# EAGLE board Pow_bank_vero_ckt_V2 (EAGLE 7.7.0)
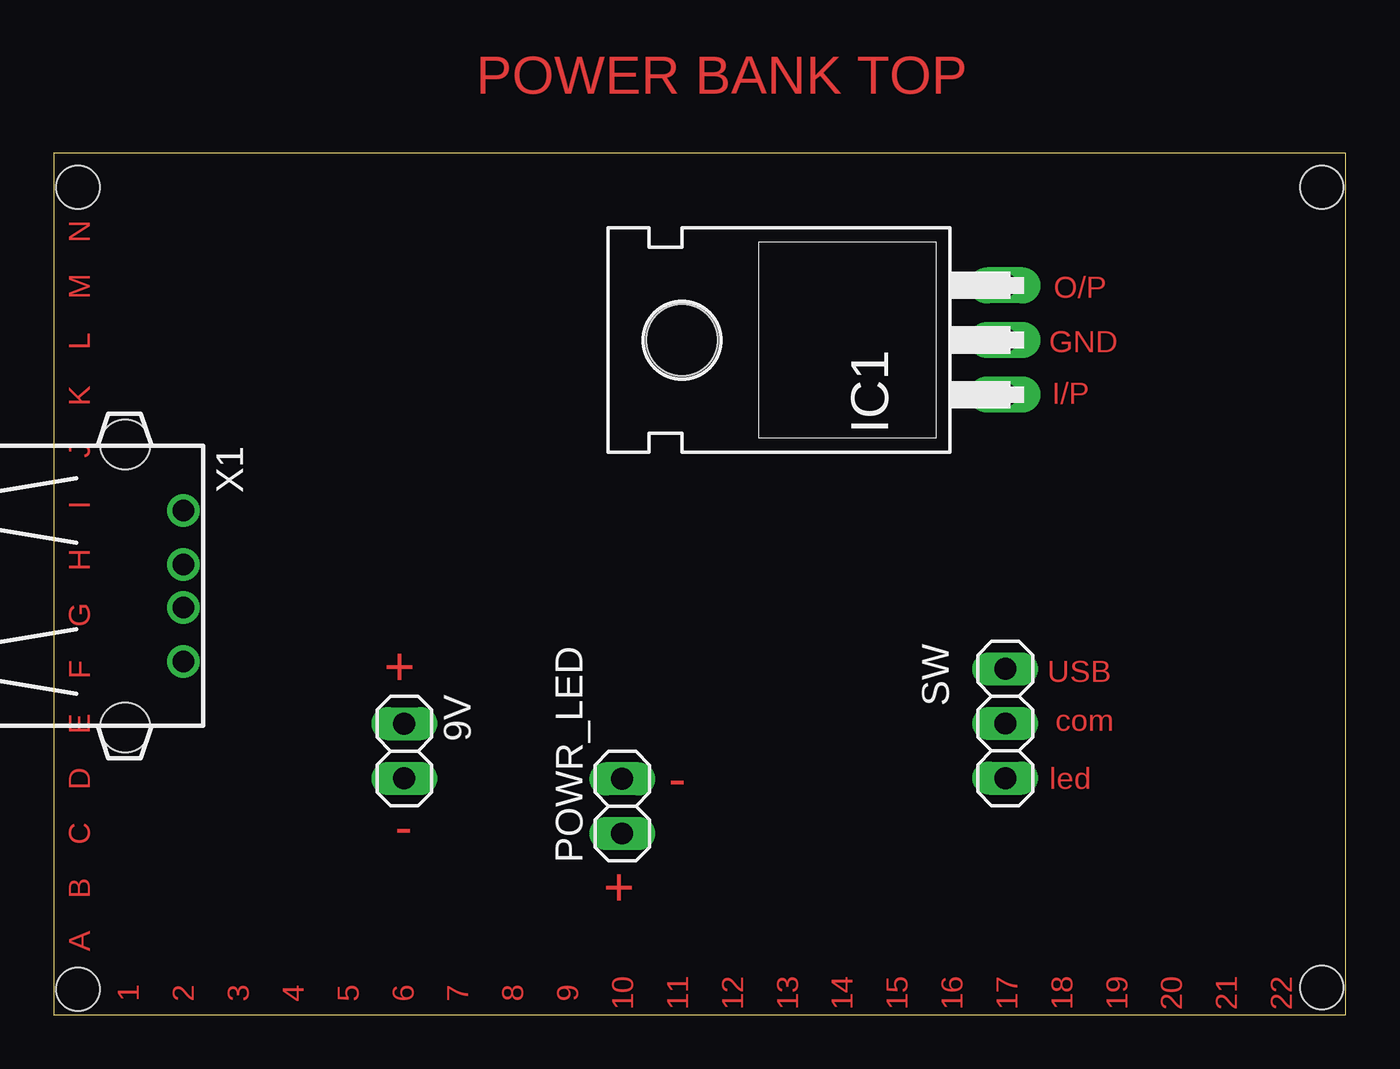
[diagram p0: board, top side]
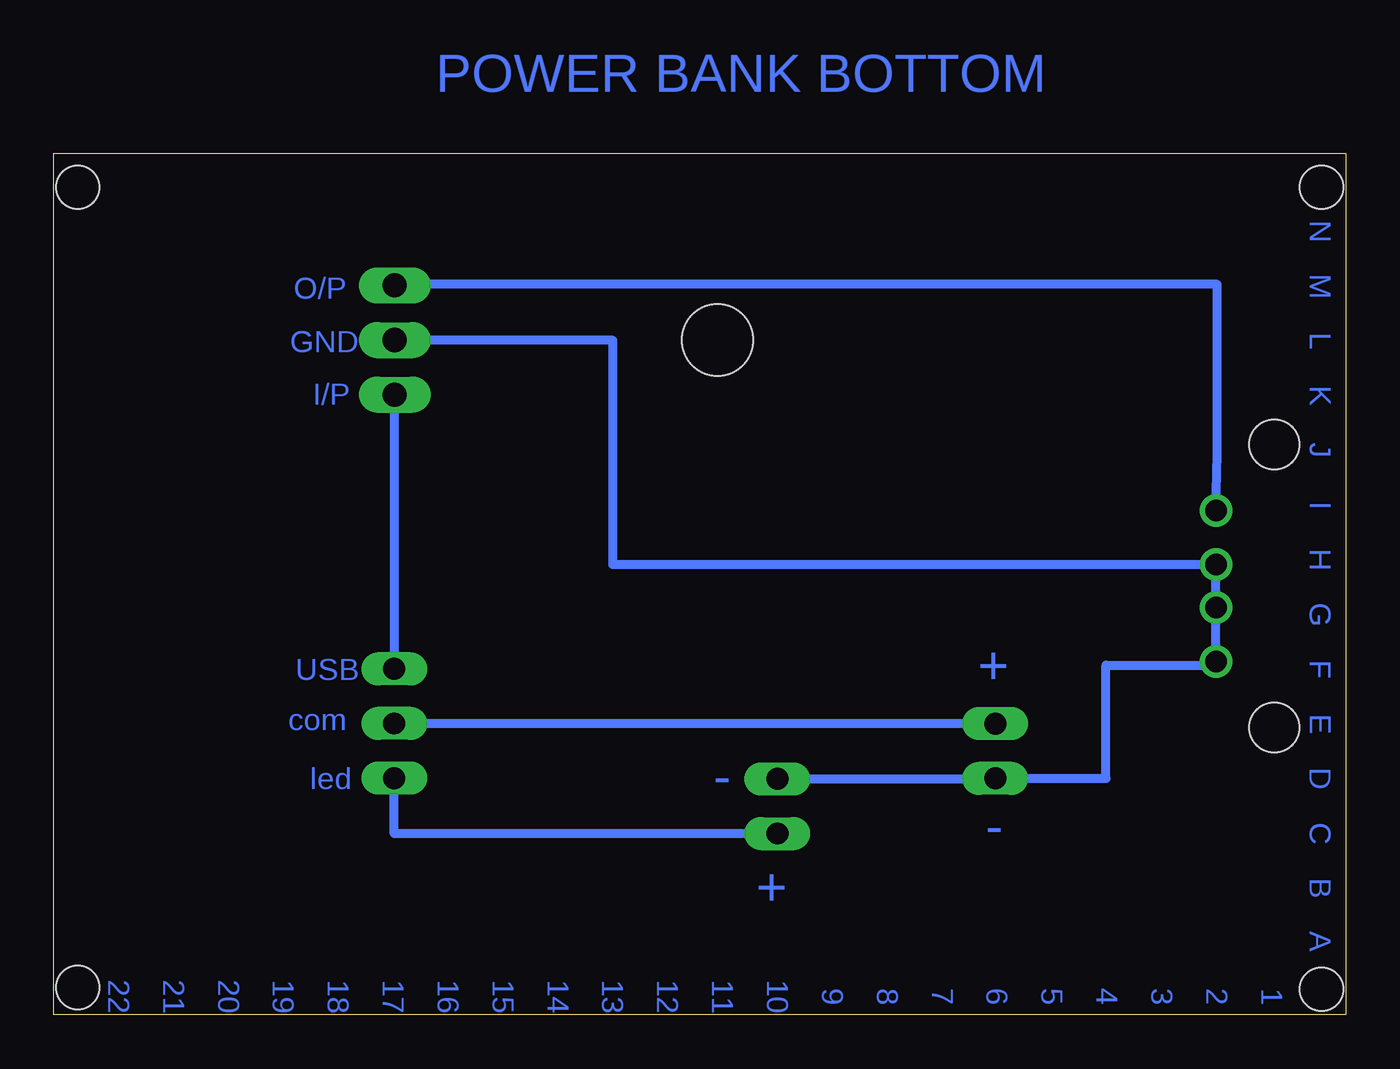
[diagram p1: board, bottom side, seen from below]

Size 60 x 40 mm. Coordinates in mm from the lower left corner, seen from the top.
Outline: 0,0 60,0 60,40 0,40 0,0
Copper layers (1*16): Top 0.035mm / dielectric 1.5mm / Bottom 0.035mm
Design rules "default": minimum track width 10mil, minimum drill 24mil, track to track 8mil, track to pad 8mil, pad to pad 8mil, via to via 8mil, smd to smd 8mil, copper to edge 40mil, drill to drill 8mil, minimum pad ring 10mil, minimum via ring 8mil, stop-mask expansion 4mil, vias tented up to drill 0mil, thermal gap 10mil
Holes 2 mm at 58.89,1.27 58.89,38.43 1.12,1.19 1.12,38.43

## Footprints (pad centres in the part's own frame; a part is rotated, then mirrored left to right if it is on the bottom)
1X02 = drill 1.016 long: 1 -1.27,0; 2 1.27,0
TO220H = drill 1.118 long: 1 -2.54,-10.16; 2 0,-10.16; 3 2.54,-10.16 | hole 3.302: 0,4.826
1X03 = drill 1.016 long: 1 -2.54,0; 2 0,0; 3 2.54,0
USB = drill 1: 1 -3.5,12.99; 2 -1,12.99; 3 1,12.99; 4 3.5,12.99 | hole 2.3: -6.57,10.28; 6.57,10.28

## Placement (x,y rotation side)
9V  [1X02]  16.27,12.25 270 top
IC1  7805T  [TO220H]  34,31.33 90 top
POWR_LED  [1X02]  26.4,9.69 90 top
SW  [1X03]  44.19,13.53 270 top
U$1  [1X14]  3.54,19.86 90 top
U$2  [1X14]  6.08,19.86 90 top
U$3  [1X14]  8.62,19.86 90 top
U$4  [1X14]  11.16,19.86 90 top
U$5  [1X14]  13.7,19.86 90 top
U$6  [1X14]  16.24,19.86 90 top
U$7  [1X14]  18.78,19.86 90 top
U$8  [1X14]  21.32,19.86 90 top
U$9  [1X14]  23.86,19.86 90 top
U$10  [1X14]  26.4,19.86 90 top
U$11  [1X14]  28.94,19.86 90 top
U$12  [1X14]  31.48,19.86 90 top
U$13  [1X14]  34.02,19.86 90 top
U$14  [1X14]  36.56,19.86 90 top
U$15  [1X14]  39.1,19.86 90 top
U$16  [1X14]  41.64,19.86 90 top
U$17  [1X14]  44.18,19.86 90 top
U$18  [1X14]  46.72,19.86 90 top
U$19  [1X14]  49.26,19.86 90 top
U$20  [1X14]  51.8,19.86 90 top
U$21  [1X14]  54.34,19.86 90 top
U$22  [1X14]  56.88,19.86 90 top
X1  [USB]  -6.96,19.91 270 top

## Library data of the parts
9V POWR_LED SW = pinhead
IC1 = linear
U$1-U$22 = pinhead_1x14_no_frame MOD
X1 = con-amp

## Nets
5V: IC1.3 X1.1
GND: 9V.2 IC1.2 POWR_LED.2 X1.2 X1.4
IP: IC1.1 SW.1
LED: POWR_LED.1 SW.3
VCC: 9V.1 SW.2

## Tracks (layer width: path | path; a pad name or v marks a point on that pad's centre or on a via)
5V
  Bottom 0.406: X1.1 5.97,26.04 5.97,33.92 44.16,33.92 IC1.3
GND
  Bottom 0.406: POWR_LED.2 16.27,10.96 9V.2 11.14,10.98 11.14,16.24 6.03,16.24 X1.4 X1.2 34.03,20.91 34.03,31.31 44.16,31.31 IC1.2
IP
  Bottom 0.406: IC1.1 44.19,28.79 SW.1
LED
  Bottom 0.406: POWR_LED.1 44.19,8.42 SW.3
VCC
  Bottom 0.406: 9V.1 SW.2

## Text on the board
Top: POWER BANK TOP | N | M | O/P | L | GND | K | I/P | J | I | H | G | F | + | USB | E | com | D | - | led | C | - | B | + | A | 1 / 2 / 3 / 4 / 5 / 6 / 7 / 8 / 9 / 10 / 11 / 12 / 13 / 14 / 15 / 16 / 17 / 18 / 19 / 20 / 21 / 22
Bottom: POWER BANK BOTTOM | N | M | O/P | L | GND | K | I/P | J | I | H | G | F | USB | + | E | com | D | - | led | C | - | B | + | A | 1 / 2 / 3 / 4 / 5 / 6 / 7 / 8 / 9 / 10 / 11 / 12 / 13 / 14 / 15 / 16 / 17 / 18 / 19 / 20 / 21 / 22